# Altium PCB passthrough_module.PcbDoc
Units mil, origin at the board's own origin, x right, y up, seen from the top; angles counter-clockwise.
Board outline 1000 x 1000 mil, 2 copper layers (Top Layer, Bottom Layer), stack 62.8 mil thick; 4 components, 10 nets, 44 pads, 36 vias.
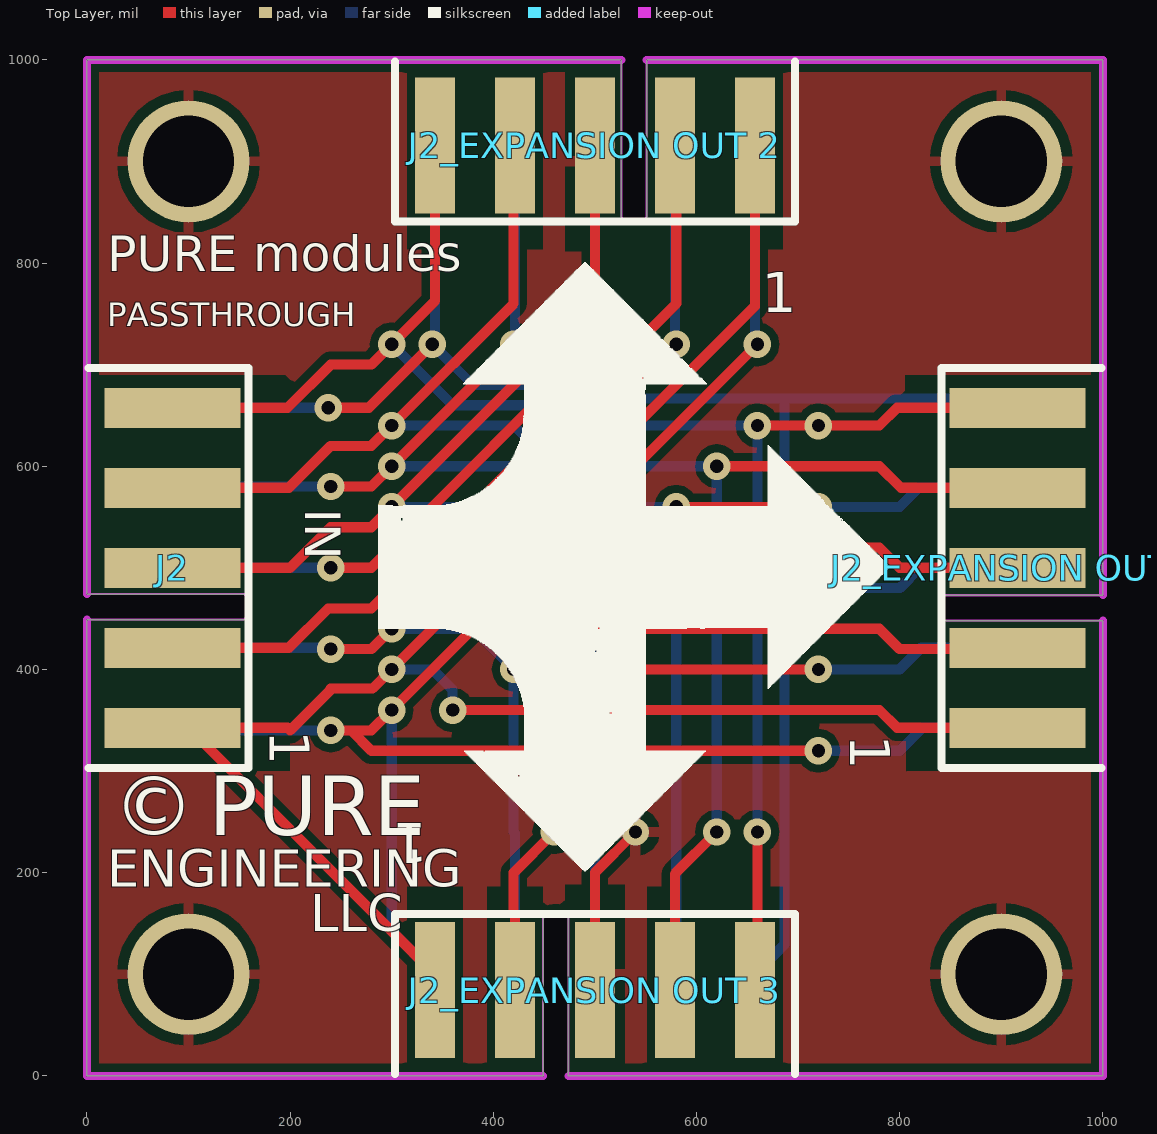
[diagram p0: Top Layer view]
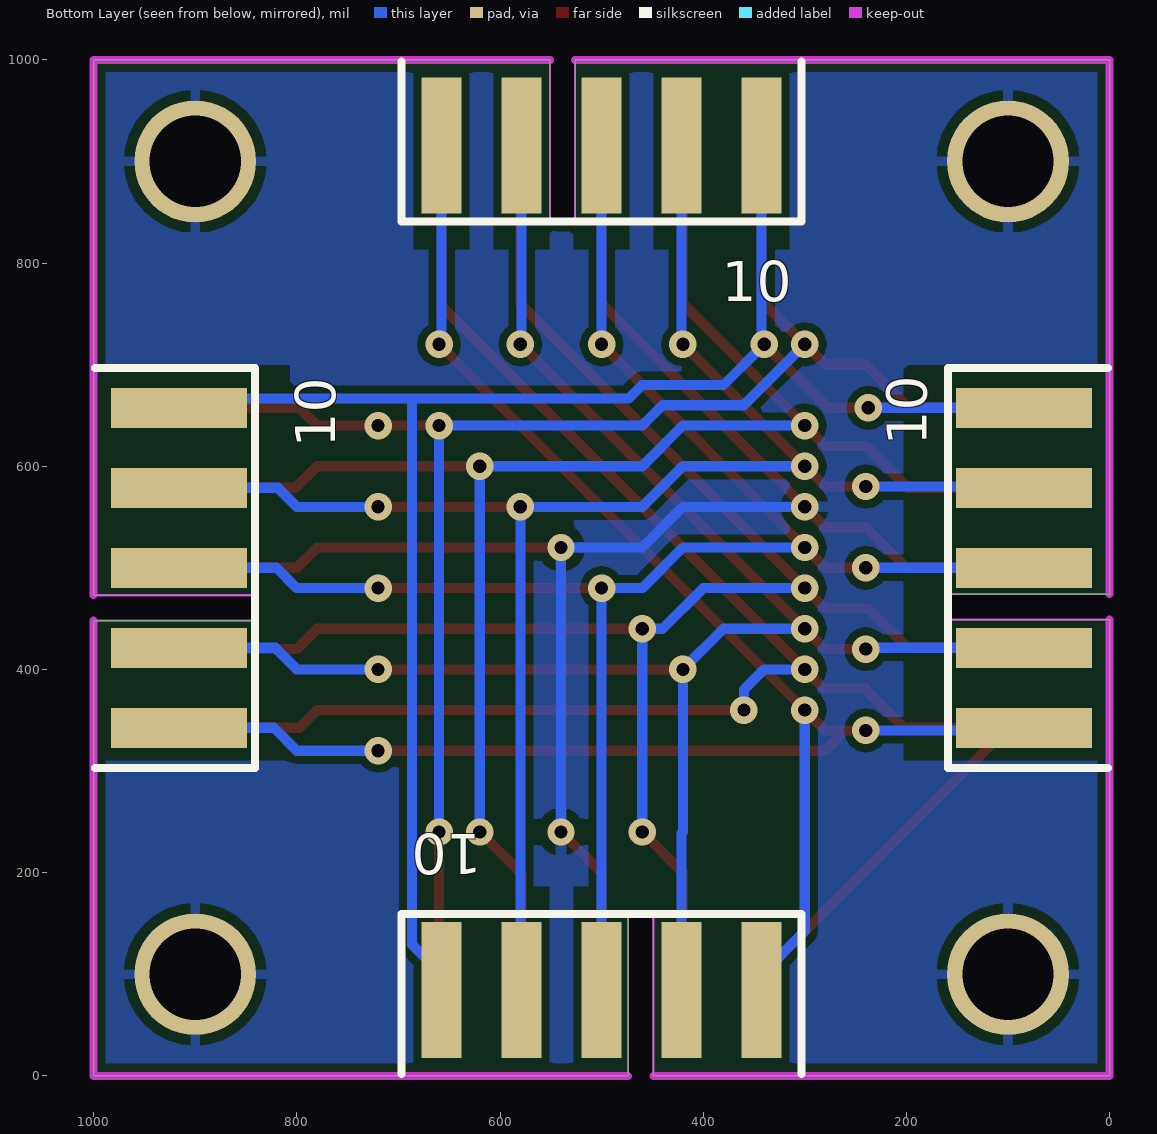
[diagram p1: Bottom Layer view, seen from below]
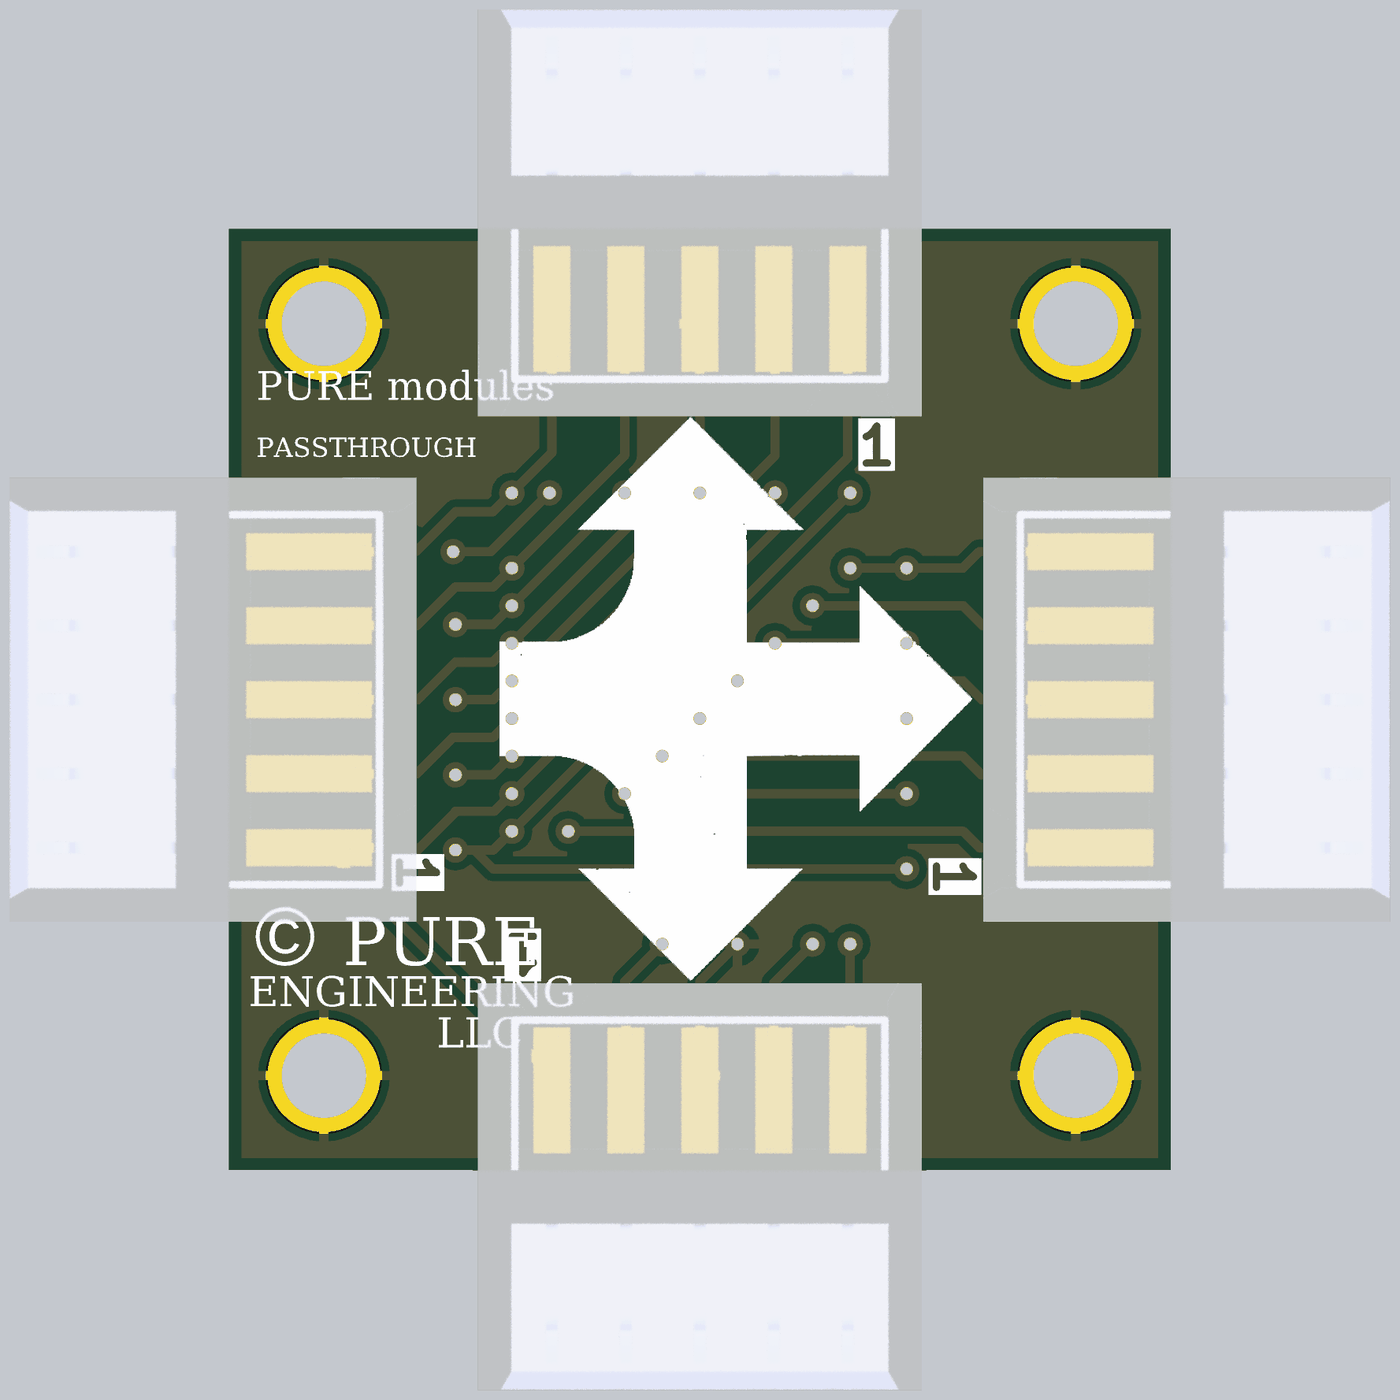
[diagram p2: 3D render of the assembled board from above, using the file's embedded part models]

## Layer stack, top to bottom
Top Solder: solder mask 0.4, Solder Resist, Dk 3.5
Top Layer: signal copper 1.4
Dielectric1: prepreg 60, FR-408, Dk 3.66
Bottom Layer: signal copper 1.4
Bottom Solder: solder mask 0.4, Solder Resist, Dk 3.5

## Board outline
449,0 449,155 cw(c461.5,142.5) 474,155 474,0 1000,0 1000,448 845,448 cw(c857.5,460.5) 845,473 1000,473 1000,1000 551,1000 551,845 cw(c538.5,857.5) 526,845 526,1000 0,1000 0,474 155,474 cw(c142.5,461.5) 155,449 0,449 0,0

## Design rules (kind name [scope] priority, off if disabled: settings)
Clearance Clearance_RF [InNetClass('RF')] p1: gap=10
Clearance [All] p2: gap=8
MinimumSolderMaskSliver [All] p1 off: minsoldermaskwidth=10
PolygonConnect PolygonConnect_TOP [All] p1: connectstyle=Relief reliefconductorwidth=10 reliefentries=4 polygonreliefangle="90 Angle" airgapwidth=10
PolygonConnect [All] p2: connectstyle=Direct reliefconductorwidth=10 reliefentries=4 polygonreliefangle="90 Angle" airgapwidth=10
RoutingVias [All] p1: holewidth=16 width=32 viastyle="Through Hole" minholewidth=16 minwidth=32 maxholewidth=28 maxwidth=50
SilkToSolderMaskClearance [IsPad] p1 off: minsilkscreentomaskgap=10 clearancetoexposedcopper=TRUE
SolderMaskExpansion [All] p1: expansion=2
UnpouredPolygon [All] p1: allowunpoured=FALSE
Width Width_RF [InNetClass('RF')] p1: maxlimit=20 minlimit=20 preferedwidth=20
Width [All] p2: maxlimit=100 minlimit=7 preferedwidth=7
27 further rules are at their usual default settings.

## Classes and differential pairs
channel class expansion_out: "EXPANSION OUT 1" "EXPANSION OUT 2" "EXPANSION OUT 3"
component class "EXPANSION OUT 3": "J2_EXPANSION OUT 3"
component class "EXPANSION OUT 2": "J2_EXPANSION OUT 2"
component class EXPANSION: J2

## Components (designator, comment, footprint, x,y, rotation, side; value= is the part's Value field where it differs from the comment)
J2 "IN" 009159010061916_FRONT#1 100,500 r270 top
"J2_EXPANSION OUT 1" "OUT" 009159010061916_FRONT#2 900,500 r270 top (schematic designator J2)
"J2_EXPANSION OUT 2" "OUT" 009159010061916_FRONT#2 500,900 r0 top (schematic designator J2)
"J2_EXPANSION OUT 3" "OUT" 009159010061916_FRONT#2 500,100 r180 top (schematic designator J2)

## Footprints (in the part's own frame and the unit in brackets; to place one, negate y for a bottom-side part, rotate by r counter-clockwise, add the part's x,y. Pads: shape width x height; smd on the part's side, far side on the other; paste and mask are expansions set on the pad)
009159010061916_FRONT#1 [mm] "PCB CONTACT for 009159010061916"
  rect 1x3.4 smd paste-10: 1(4,-0.4) 2(2,-0.4) 3(0,-0.4) 4(-2,-0.4) 5(-4,-0.4)
  rect 1x3.4 smd far side paste-10: 6(4,-0.4) 7(2,-0.4) 8(0,-0.4) 9(-2,-0.4) 10(-4,-0.4)
  silkscreen extent -5,-2.5 5,1.5, body extent -6,-8.5 6,2.5, height 2.5
009159010061916_FRONT#2 [mm] "PCB CONTACT for 009159010061916"
  rect 1x3.4 smd paste-10: 1(4,0.4) 2(2,0.4) 3(0,0.4) 4(-2,0.4) 5(-4,0.4)
  rect 1x3.4 smd far side paste-10: 6(4,0.4) 7(2,0.4) 8(0,0.4) 9(-2,0.4) 10(-4,0.4)
  silkscreen extent -5,-1.5 5,2.5, body extent -6,-2.5 6,8.5, height 2.5

## Part data
J2 "J2_EXPANSION OUT 1" "J2_EXPANSION OUT 2" "J2_EXPANSION OUT 3": library part 009159010061916, "CONN SSL BRIDGE 10POS 2MM Open Ended Card Edge: 00-9159"

## Free pads (board coordinates)
  round 120 hole 90: 0(100,100) 0(100,900) 0(900,100) 0(900,900)

## Via types
v1: diameter 27, hole 13, Top Layer to Bottom Layer, tented both sides, 36 vias

## Nets (pads, with @x,y where several pads share a name; then routed paths per layer and width w, separated by ;. In a path a pad name is that pad's centre, name@x,y a point inside that pad or via, vN(x,y) a via of type N, cw(c..) or ccw(c..) an arc to the next point about the centre after c; other vN are vias at no path point)
GND: "J2_EXPANSION OUT 1.3" "J2_EXPANSION OUT 2.3" "J2_EXPANSION OUT 3.3" J2.3 pad.0 | length 1709.1
  Top Layer w10: J2.3@100,500 200,500 240,540 280,540 v1(300,560) 500,760 500,900 ; 500,100 500,200 v1(540,240) ; v1(540,520) 780,520 800,500 900,500
  Bottom Layer w10: v1(300,560) 420,560 460,520 v1(540,520) v1(540,240)
GPIO6: "J2_EXPANSION OUT 1.6" "J2_EXPANSION OUT 2.6" "J2_EXPANSION OUT 3.6" J2.6 | length 1834.7
  Top Layer w10: v1(240,340) 260,340 ; v1(660,720) v1(300,360) 280,340 260,340 ; v1(720,320) 280,320 260,340
  Bottom Layer w10: J2.6@100,342.52 102.52,340 v1(240,340) ; v1(300,360) 300,142.52 342.52,100 ; 657.48,900 657.48,722.52 v1(660,720) ; v1(720,320) 800,320 822.52,342.52 900,342.52
GPIO7: "J2_EXPANSION OUT 1.7" "J2_EXPANSION OUT 2.7" "J2_EXPANSION OUT 3.7" J2.7 | length 1710.7
  Top Layer w10: v1(240,420) 280,420 v1(300,440) v1(580,720) ; v1(420,400) v1(720,400)
  Bottom Layer w10: J2.7@100,421.26 v1@240,421.26 ; v1(300,440) 380,440 v1(420,400) 420,240 421.26,238.74 421.26,100 ; 578.74,900 578.74,721.26 v1(580,720) ; v1(720,400) 800,400 821.26,421.26 900,421.26
GPIO8: "J2_EXPANSION OUT 1.8" "J2_EXPANSION OUT 2.8" "J2_EXPANSION OUT 3.8" J2.8 | length 1694.4
  Top Layer w10: v1(240,500) 280,500 v1(300,520) v1(500,720) ; v1(500,480) v1(720,480)
  Bottom Layer w10: J2.8@100,500 v1(240,500) ; v1(300,520) 420,520 460,480 v1(500,480) 500,240 500,100 ; v1(500,720) 500,900 ; v1(720,480) 800,480 820,500 900,500 887,487
GPIO9: "J2_EXPANSION OUT 1.9" "J2_EXPANSION OUT 2.9" "J2_EXPANSION OUT 3.9" J2.9 | length 1643.4
  Top Layer w10: v1(240,580) 280,580 v1(300,600) v1(420,720) ; v1(580,560) v1(720,560)
  Bottom Layer w10: J2.9@100,578.74 101.26,580 v1(240,580) ; v1(300,600) 420,600 460,560 v1(580,560) 580,101.26 578.74,100 ; v1@421.26,720 421.26,900 ; v1(720,560) 800,560 818.74,578.74 900,578.74
I\N\T\: "J2_EXPANSION OUT 1.10" "J2_EXPANSION OUT 2.10" "J2_EXPANSION OUT 3.10" J2.10 | length 1611.4
  Top Layer w10: v1(237.48,657.48) 277.48,657.48 v1(340,720)
  Bottom Layer w10: J2.10@100,657.48 v1(237.48,657.48) ; 342.52,900 342.52,722.52 v1(340,720) 380,680 460,680 473.5,666.5 686.5,666.5 ; 657.48,100 686.5,129.02 686.5,666.5 ; 900,657.48 890.98,666.5 686.5,666.5
SCL: "J2_EXPANSION OUT 1.5" "J2_EXPANSION OUT 2.5" "J2_EXPANSION OUT 3.5" J2.5 | length 1603.6
  Top Layer w10: J2.5@100,657.48 197.48,657.48 240,700 280,700 342.52,762.52 342.52,900 ; 657.48,100 657,100.48 660,103.48 v1(660,240) ; v1(660,640) v1(720,640) 780,640 797.48,657.48 900,657.48
  Bottom Layer w10: v1(300,720) 360,660 440,660 460,640 657,640 660,637 v1(660,240)
SDA: "J2_EXPANSION OUT 1.4" "J2_EXPANSION OUT 2.4" "J2_EXPANSION OUT 3.4" J2.4 | length 1678.1
  Top Layer w10: J2.4@100,578.74 198.74,578.74 240,620 280,620 v1(300,640) 420,760 420,898.74 421.26,900 ; 578.74,100 578.74,198.74 v1(620,240) ; v1(620,600) 780,600 801.26,578.74 900,578.74
  Bottom Layer w10: v1(300,640) 420,640 460,600 v1(620,600) v1(620,240)
VCC_SYSTEM: "J2_EXPANSION OUT 1.1" "J2_EXPANSION OUT 2.1" "J2_EXPANSION OUT 3.1" J2.1 | length 1853.2
  Top Layer w10: 342.52,100 100,342.52 197.48,342.52 200,340 240,380 240,381.26 281.26,381.26 v1(300,400) 657.48,757.48 657.48,900 ; v1(360,360) 780,360 797.48,342.52 900,342.52
  Bottom Layer w10: v1(300,400) 340,400 360,380 v1(360,360)
VIN: "J2_EXPANSION OUT 1.2" "J2_EXPANSION OUT 2.2" "J2_EXPANSION OUT 3.2" J2.2 | length 1739.8
  Top Layer w10: J2.2@100,421.26 198.74,421.26 237.48,460 280,460 v1(300,480) 580,760 580,881.26 ; 421.26,100 421.26,160 420,161.26 420,200 v1(460,240) ; v1(460,440) 780,440 800,420 914.49,420 915.75,421.26
  Bottom Layer w10: v1(300,480) 400,480 440,440 v1(460,440) v1(460,240)

## Polygon pours and split planes (outlines as drawn)
GND on Top Layer "GND" (solid, remove dead copper, pour order 16): 0,-5 0,1000 1000,1000 1000,-5
GND on Bottom Layer "GND" (solid, remove dead copper, pour order 19): 0,-5 0,1000 1000,1000 1000,-5

## Keep-outs
Keep-Out Layer:
  the board outline again, w2

## Other copper
Top Layer:
  pour cut-out: 806.12,299.36 806.76,300 1010,300 1010,685 1005,690 805,690
  pour cut-out: -3.88,299.36 -3.24,300 200,300 200,685 195,690 -5,690
Bottom Layer:
  pour cut-out: -0.64,309.36 0,310 203.24,310 203.24,695 198.24,700 -1.76,700
  pour cut-out: 807.74,309.36 808.38,310 1011.62,310 1011.62,695 1006.62,700 806.62,700

## Silkscreen, mask and mechanical layers (free items; w line width, h text height)
Top Overlay:
  region: 2474 vertices and 6 holes, not listed, extent 286.96,201.15 789.95,800.62
  text "PURE modules" at 20,780 h60
  text "PASSTHROUGH" at 20,730 h40
  text "©" at 26.06,217.58 h100.1
  text "PURE" at 119.9,217.58 h100.1
  text "ENGINEERING" at 19.81,173.79 h62.56
  text "LLC" at 220,130 h62.56
Drill Drawing:
  lines w10: -220,60 -200,0 ; -220,940 -200,1000 ; -210,0 -190,0 ; -210,1000 -190,1000 ; -200,224.08 -200,0 ; -200,775.92 -200,1000 ; -180,60 -200,0 ; -180,940 -200,1000 ; 0,1190 0,1210 ; 60,1180 0,1200 ; 60,1220 0,1200 ; 224.08,1200 0,1200 ; 775.92,1200 1000,1200 ; 940,1180 1000,1200 ; 940,1220 1000,1200 ; 1000,1190 1000,1210
  text "Fabrication Notes" at 5395,1693 h100
  text "1. Inches are the controlling dimensions for the drawings and supplied data." at 3915,1238 h80
  text "1000 (mil)" at 234.08,1164.01 h60
  text "2. Material  370HR,  HASL Finish" at 3905,1038 h80
  text "3. Finished board thickness  ..062\"" at 3910,848 h80
  text "4. Inner Layers 1/2 oz Cu, Outer layers 1 oz Cu. CU" at 3915,668 h80
  text "5. Green Solder Mask - White Silkscreen" at 3905,513 h80
  text "6. No identifiable markings shall be made on the PCB" at 3895,338 h80
  text "1000 (mil)" at -164.01,234.08 h60 r90
  text ".Layer_Name" at 1038,205 h35
  text ".Legend" at 3905,102 h50

## Text inside footprints (layer, text, board x,y; h text height)
J2: Top Overlay "1" at 180,340 h39.37 r270; Bottom Overlay "10" at 180,620 h39.37 r270
"J2_EXPANSION OUT 1": Top Overlay "1" at 751.38,335.63 h39.37 r270; Bottom Overlay "10" at 762.2,618.11 h39.37 r270
"J2_EXPANSION OUT 2": Top Overlay "1" at 664.37,751.38 h39.37; Bottom Overlay "10" at 381.89,762.2 h39.37
"J2_EXPANSION OUT 3": Top Overlay "1" at 335.63,248.62 h39.37 r180; Bottom Overlay "10" at 618.11,237.8 h39.37 r180